# EAGLE board protoCuantumv2old (EAGLE 9.6.2)
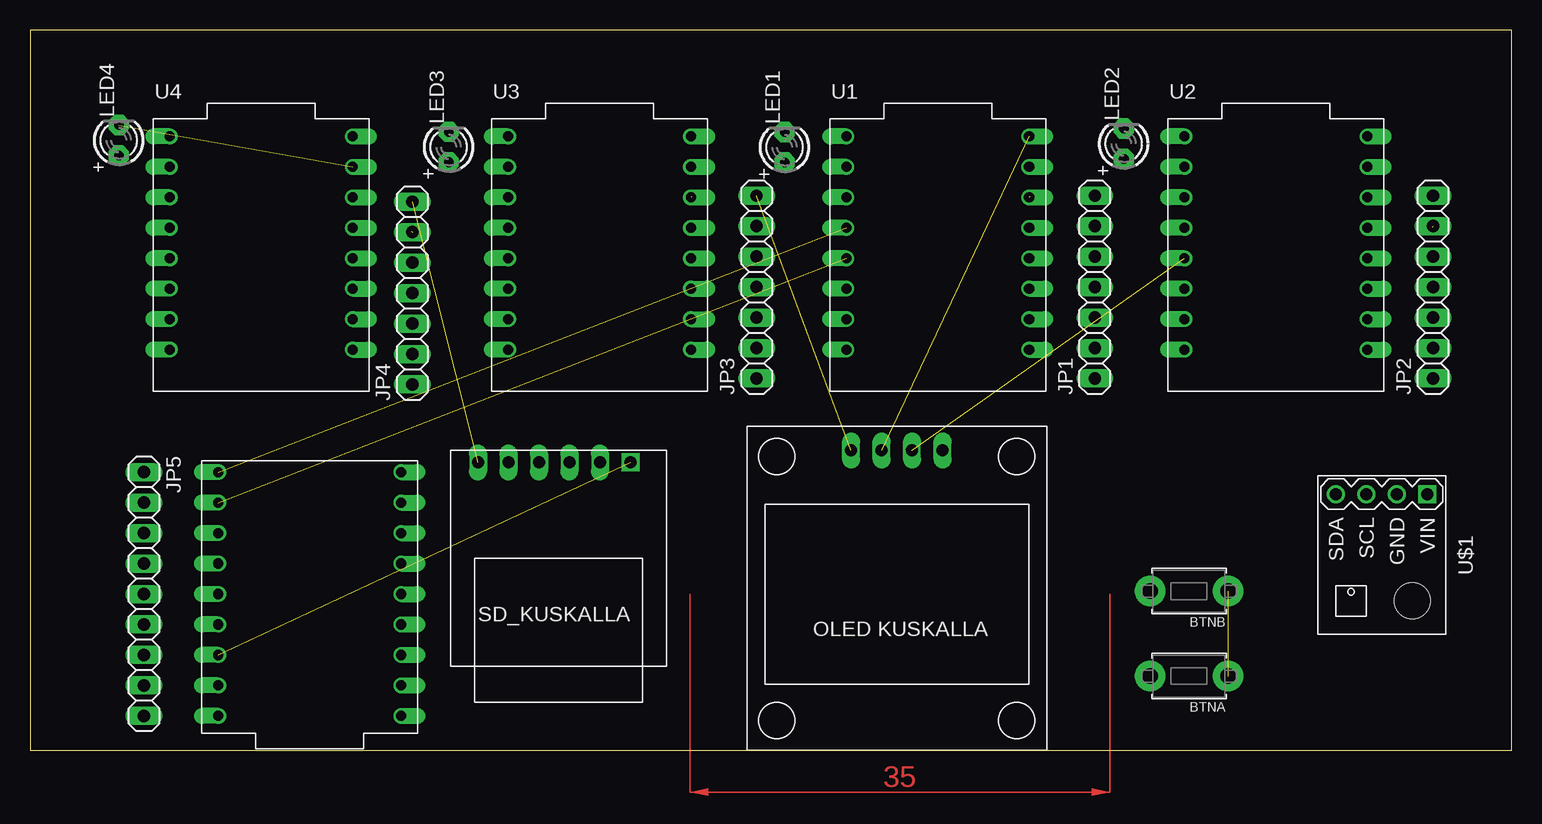
[diagram p0: board, top side]
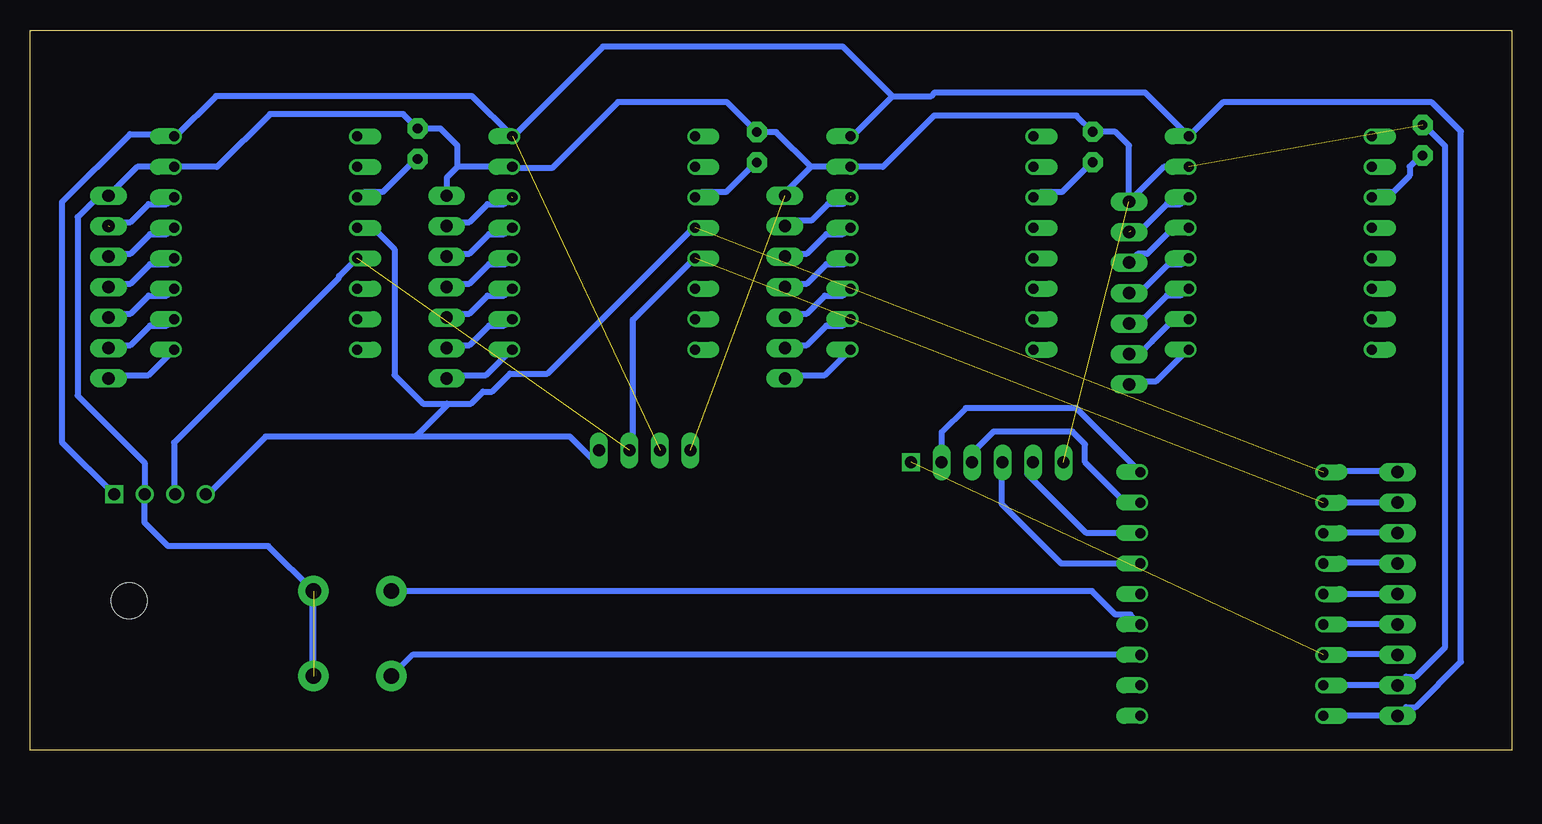
[diagram p1: board, bottom side, seen from below]

Size 123.5 x 60 mm. Coordinates in mm from the lower left corner, seen from the top.
Outline: 0,0 123.5,0 123.5,60 0,60 0,0
Copper layers (1*16): Top 0.035mm / dielectric 1.5mm / Bottom 0.035mm
Design rules "default *": minimum track width 0.5mm, minimum drill 0.8mm, track to track 0.8mm, track to pad 0.8mm, pad to pad 0.8mm, via to via 0.8mm, smd to smd 6mil, copper to edge 40mil, drill to drill 6mil, minimum pad ring 10mil, minimum via ring 8mil, stop-mask expansion 4mil, vias tented up to drill 0mil, thermal gap 10mil

## Footprints (pad centres in the part's own frame; a part is rotated, then mirrored left to right if it is on the bottom)
TACT_PANA-EVQ = drill 1.3 pad 2.54: P$1 -3.25,0; P$2 3.25,0
1X07 = drill 1.016 long: 1 -7.62,0; 2 -5.08,0; 3 -2.54,0; 4 0,0; 5 2.54,0; 6 5.08,0; 7 7.62,0
1X09 = drill 1.016 long: 1 -10.16,0; 2 -7.62,0; 3 -5.08,0; 4 -2.54,0; 5 0,0; 6 2.54,0; 7 5.08,0; 8 7.62,0; 9 10.16,0
LED3MM = drill 0.813 pad 1.676 octagon: A -1.27,0; K 1.27,0
MODULE_ESP32-C3_SUPERMINI_TH = drill 0.84 offset: 0 7.62,-7.88; 1 7.62,-5.34; 2 7.62,-2.8; 3 7.62,-0.26; 3.3 7.62,4.82; 4 7.62,2.28; 5 -7.62,9.9; 5V 7.62,9.9; 6 -7.62,7.36; 7 -7.62,4.82; 8 -7.62,2.28; 9 -7.62,-0.26; 10 -7.62,-2.8; 20 -7.62,-5.34; 21 -7.62,-7.88; G 7.62,7.36
MODULE_ESP32-C3_SUPERMINI_TH' = drill 0.84 offset: 1 -7.62,4.82; 2 -7.62,2.28; 3 -7.62,-0.26; 3.3 7.62,4.82; 4 -7.62,-2.8; 5 -7.62,-5.34; 5V 7.62,9.9; 6 -7.62,-7.88; 7 -7.62,-10.42; 8 7.62,-10.42; 9 7.62,-7.88; 10 7.62,-5.34; 11 7.62,-2.8; 12 7.62,-0.26; 13 7.62,2.28; G 7.62,7.36; RX -7.62,7.36; TX -7.62,9.9
TEMP-HUM-PRES-BME280 = drill 1 square: 1 -5.08,3.81 | drill 1: 2 -5.08,1.27; 3 -5.08,-1.27; 4 -5.08,-3.81 | hole 3: 3.81,2.54
SD_KUSKALLA = drill 1 square: 3V3 -8,6 | drill 1 long: CLK -8,-1.62; CS -8,3.46; GND -8,-6.7; MISO -8,-4.16; MOSI -8,0.92
OLED_KUSKALLA = drill 1 long: GND -3.81,11.5; SCK 1.27,11.5; SDA 3.81,11.5; VDD -1.27,11.5

## Placement (x,y rotation side)
BTNA  [TACT_PANA-EVQ]  96.62,6.16 180 top
BTNB  [TACT_PANA-EVQ]  96.62,13.24 180 top
JP1  [1X07]  88.77,38.58 90 top
JP2  [1X07]  116.96,38.58 90 top
JP3  [1X07]  60.57,38.58 90 top
JP4  [1X07]  31.88,38.08 90 top
JP5  [1X09]  9.5,13 270 top
LED1  [LED3MM]  62.91,50.23 90 top
LED2  [LED3MM]  91.18,50.52 90 top
LED3  [LED3MM]  34.91,50.25 90 top
LED4  [LED3MM]  7.41,50.81 90 top
U1  ESP32-C3_SUPERMINI_TH  [MODULE_ESP32-C3_SUPERMINI_TH]  75.67,41.24 0 top
U2  ESP32-C3_SUPERMINI_TH  [MODULE_ESP32-C3_SUPERMINI_TH]  103.86,41.24 0 top
U3  ESP32-C3_SUPERMINI_TH  [MODULE_ESP32-C3_SUPERMINI_TH]  47.47,41.24 0 top
U4  ESP32-C3_SUPERMINI_TH  [MODULE_ESP32-C3_SUPERMINI_TH]  19.28,41.24 0 top
U5  ESP32-C3_SUPERMINI_TH  [MODULE_ESP32-C3_SUPERMINI_TH']  23.32,12.74 180 top
U$1  TEMP-HUM-PRES-BME280  [TEMP-HUM-PRES-BME280]  112.68,16.24 270 top
U$2  SD_KUSKALLA  [SD_KUSKALLA]  44.05,15.97 270 top
U$3  OLED_KUSKALLA  [OLED_KUSKALLA]  72.26,13.47 0 top

## Library data of the parts
BTNA BTNB LED1-LED4 = adafruit
JP1-JP5 = pinhead
U1-U4 = ESP32-C3_SUPERMINI_TH; AVAILABILITY: Not in stock; CHECK_PRICES: https://www.snapeda.com/parts/ESP32-C3%20SuperMini_TH/Espressif+Systems/view-part/?ref=eda; DESCRIPTION: Super tiny ESP32-C3 board; MF: Espressif Systems; MP: ESP32-C3 SuperMini_TH; PACKAGE: Package; PRICE: None; SNAPEDA_LINK: https://www.snapeda.com/parts/ESP32-C3%20SuperMini_TH/Espressif+Systems/view-part/?ref=snap
U5 = ESP32-S3_SUPERMINI_TH; AVAILABILITY: Not in stock; DESCRIPTION: Super tiny ESP32-S3; MARCA: model S3 esp32; MF: Espressif Systems; MODEL: esp32 S3; MP: ESP32-S3 SuperMini_TH; PACKAGE: Package
U$1 = diy-modules
U$2 = SD_KUSKALLA
U$3 = OLED_KUSKALLA

## Nets
3.3A: JP1.6 U1.3.3
3.3B: JP2.6 U2.3.3
3.3C: JP3.6 U3.3.3
3.3D: JP4.6 U4.3.3
3V3: JP5.7 U5.3.3 U$2.3V3
5V: JP5.9 U1.5V U2.5V U3.5V U4.5V U5.5V U$1.1 U$3.VDD
CLK: U5.4 U$2.CLK
CS: U5.7 U$2.CS
GND: BTNA.P$1 BTNB.P$1 JP1.7 JP2.7 JP3.7 JP4.7 JP5.8 LED1.K LED2.K LED3.K LED4.K U1.G U2.G U3.G U4.G U5.G U$1.2 U$2.GND U$3.GND
GPIO1: BTNA.P$2 U5.1
GPIO2: BTNB.P$2 U5.2
GPIO3: U5.3
GPIO10: JP5.3 U5.10
GPIO11: JP5.4 U5.11
GPIO12: JP5.5 U5.12
GPIO13: JP5.6 U5.13
MISO: U5.5 U$2.MISO
MOSI: U5.6 U$2.MOSI
N$1: LED2.A U2.7
N$2: JP2.1 U2.0
N$3: LED1.A U1.7
N$4: U3.8
N$5: U3.9
N$6: U4.8
N$9: U4.9
N$11: JP4.1 U4.0
N$12: JP4.2 U4.1
N$13: LED3.A U3.7
N$14: LED4.A U4.7
N$15: JP1.1 U1.0
N$16: JP1.2 U1.1
N$17: JP1.3 U1.2
N$18: JP1.4 U1.3
N$19: JP1.5 U1.4
N$20: JP2.2 U2.1
N$21: JP2.3 U2.2
N$22: JP2.4 U2.3
N$23: JP2.5 U2.4
N$24: JP3.1 U3.0
N$25: JP3.2 U3.1
N$26: JP3.3 U3.2
N$27: JP3.4 U3.3
N$28: JP3.5 U3.4
N$29: JP4.3 U4.2
N$30: JP4.4 U4.3
N$31: JP4.5 U4.4
RX: U5.RX
SCK: JP5.2 U1.9 U2.9 U5.9 U$1.3 U$3.SCK
SDA: JP5.1 U1.8 U2.8 U5.8 U$1.4 U$3.SDA
XT: U5.TX

## Tracks (layer width: path | path; a pad name or v marks a point on that pad's centre or on a via)
3.3A  (1 unrouted)
  Bottom 0.5: 83.38,46.12 84,45.5 85.38,45.5 86.88,44 88.12,44 88.25,44.12 88.75,43.62 JP1.6
3.3B  (1 unrouted)
  Bottom 0.5: 116.88,43.62 116.38,44.12 116.25,44 115.12,44 113.62,45.5 112.12,45.5 111.5,46.12 U2.3.3
3.3C  (1 unrouted)
  Bottom 0.5: 55.12,46.12 55.75,45.5 57,45.5 58.38,44.12 60,44.12 60.5,43.62 JP3.6
3.3D  (1 unrouted)
  Bottom 0.5: 31.75,43.25 31.38,43.62 31.25,43.5 30.75,43.5 28.75,45.5 27.62,45.5 27,46.12 U4.3.3
3V3  (1 unrouted)
  Bottom 0.5: U5.3.3 15.62,7.88 15.5,8 9.88,8 9.75,7.88 9.62,8 9.5,8 JP5.7
5V  (1 unrouted)
  Bottom 0.5: 51.62,54.5 48.38,54.5 48.08,54.8 30.56,54.8 U4.5V 24.07,53.97 6.63,53.97 4.22,51.56 4.22,7.33 7.99,3.57 8.77,3.57 JP5.9 U5.5V | 51.62,54.5 55,51.12 U3.5V | 51.62,54.5 55.75,58.62 75.75,58.62 83.12,51.25 U1.5V 86.65,54.5 108,54.5 111.36,51.14 U2.5V 111.67,51.32 115.16,51.32 120.83,45.65 120.83,25.66 U$1.1
CLK
  Bottom 0.5: U5.4 37.54,15.54 42.5,20.5 42.5,23.9 U$2.CLK
CS
  Bottom 0.5: U5.7 36.28,28.5 45.5,28.5 47.51,26.49 U$2.CS
GND  (4 unrouted)
  Bottom 0.5: U5.G JP5.8 8.77,6.11 7.99,6.11 5.52,8.57 5.52,50.32 7.28,52.08 LED4.K | U4.G 28.98,48.6 JP4.7 31.88,50.38 33.02,51.52 LED3.K 36.25,52.86 48.14,52.86 52.4,48.6 U3.G 58.4,48.6 | 87.87,48.6 U1.G 83.19,48.5 80,48.5 74.5,54 65.41,54 LED1.K 61.3,51.5 58.4,48.6 | JP1.7 88.77,47.7 87.87,48.6 | 87.87,48.6 87.87,50.37 89.29,51.79 LED2.K 92.39,53 103.5,53 107.9,48.6 U2.G 114.56,48.6 JP2.7 117.75,46.2 119.53,44.41 119.53,29.53 113.95,23.95 U$1.2 113.95,18.95 112,17 103.63,17 BTNB.P$1 | BTNB.P$1 100,13.11 100,5.5 99.87,5.63 BTNB.P$1 | JP3.7 60.57,46.43 58.4,48.6
GPIO1
  Bottom 0.5: U5.1 91.61,7.92 BTNA.P$2
GPIO2
  Bottom 0.5: U5.2 31.76,11.28 33,11.28 34.97,13.24 BTNB.P$2
GPIO10
  Bottom 0.5: U5.10 15.62,18 15.5,18.12 9.88,18.12 9.75,18 9.62,18.12 9.5,18.12 JP5.3
GPIO11
  Bottom 0.5: U5.11 15.62,15.5 15.5,15.62 9.88,15.62 9.75,15.5 9.62,15.62 9.5,15.62 JP5.4
GPIO12
  Bottom 0.5: U5.12 10.5,13 10.12,12.62 9.62,13.12 JP5.5
GPIO13
  Bottom 0.5: U5.13 15.62,10.38 15.5,10.5 9.88,10.5 9.75,10.38 9.62,10.5 9.5,10.5 JP5.6
MISO
  Bottom 0.5: U5.5 31,18.12 35.5,18.12 40.38,23 40.25,23.12 40.25,23.5 40.38,23.62 40,24 U$2.MISO
MOSI
  Bottom 0.5: U5.6 31.26,20.94 32.5,20.94 35.55,23.98 35.55,25.47 36.6,26.53 43.18,26.53 44.97,24.73 U$2.MOSI
N$1
  Bottom 0.5: LED2.A 91.38,49.25 94.12,46.5 95.62,46.5 96.12,46 U2.7
N$2
  Bottom 0.5: U2.0 111.5,33.38 113.62,31.25 116.25,31.25 116.38,31.38 116.88,30.88 JP2.1
N$3
  Bottom 0.5: U1.7 68,46 67.5,46.5 65.5,46.5 63,49 LED1.A
N$11
  Bottom 0.5: U4.0 27,33.38 29.62,30.75 31.25,30.75 31.38,30.88 31.88,30.38 JP4.1
N$12
  Bottom 0.5: U4.1 28.15,35.9 29.97,34.07 29.97,34.03 31,33 JP4.2
N$13
  Bottom 0.5: U3.7 39.75,46 39.25,46.5 37.5,46.5 35,49 LED3.A
N$14
  Bottom 0.5: U4.7 11.62,46 11.12,46.5 9.88,46.5 8.5,47.88 8.5,48.62 7.5,49.62 LED4.A
N$15
  Bottom 0.5: U1.0 83.38,33.38 85.5,31.25 88.12,31.25 88.25,31.38 88.75,30.88 JP1.1
N$16
  Bottom 0.5: JP1.2 88.62,33.5 88.25,33.88 88.12,33.75 86.88,33.75 85.25,35.38 84,35.38 83.38,36 U1.1
N$17
  Bottom 0.5: U1.2 83.38,38.5 84,37.88 85.38,37.88 86.88,36.38 88.12,36.38 88.25,36.5 88.75,36 JP1.3
N$18
  Bottom 0.5: U1.3 83.38,41 83.88,40.5 85.25,40.5 86.88,38.88 88.12,38.88 88.25,39 88.75,38.5 JP1.4
N$19
  Bottom 0.5: U1.4 83.38,43.62 84,43 85.25,43 86.88,41.38 88.12,41.38 88.25,41.5 88.75,41 JP1.5
N$20
  Bottom 0.5: JP2.2 116.75,33.5 116.38,33.88 116.25,33.75 115.12,33.75 113.5,35.38 112.12,35.38 111.5,36 U2.1
N$21
  Bottom 0.5: U2.2 111.5,38.5 112.12,37.88 113.62,37.88 115.12,36.38 116.25,36.38 116.38,36.5 116.88,36 JP2.3
N$22
  Bottom 0.5: U2.3 111.5,41 112,40.5 113.5,40.5 115.12,38.88 116.25,38.88 116.38,39 116.88,38.5 JP2.4
N$23
  Bottom 0.5: U2.4 111.5,43.62 112.12,43 113.5,43 115.12,41.38 116.25,41.38 116.38,41.5 116.88,41 JP2.5
N$24
  Bottom 0.5: U3.0 55.12,33.38 57.25,31.25 59.88,31.25 60,31.38 60.5,30.88 JP3.1
N$25
  Bottom 0.5: JP3.2 60.38,33.5 60,33.88 59.88,33.75 58.75,33.75 57.12,35.38 55.75,35.38 55.12,36 U3.1
N$26
  Bottom 0.5: U3.2 55.12,38.5 55.75,37.88 57.25,37.88 58.75,36.38 59.88,36.38 60,36.5 60.5,36 JP3.3
N$27
  Bottom 0.5: U3.3 55.12,41 55.62,40.5 57.12,40.5 58.75,38.88 59.88,38.88 60,39 60.5,38.5 JP3.4
N$28
  Bottom 0.5: U3.4 55.12,43.62 55.75,43 57.12,43 58.75,41.38 59.88,41.38 60,41.5 60.5,41 JP3.5
N$29
  Bottom 0.5: JP4.3 31.88,35.5 31.38,36 30.62,36 28.75,37.88 27.62,37.88 27,38.5 U4.2
N$30
  Bottom 0.5: U4.3 27,41 27.5,40.5 28.62,40.5 30.75,38.38 31.25,38.38 31.38,38.5 31.88,38 JP4.4
N$31
  Bottom 0.5: JP4.5 31.15,41.35 30.36,41.35 28.19,43.52 U4.4
SCK  (2 unrouted)
  Bottom 0.5: U1.9 68.12,41 73.25,35.88 73.25,25.38 73.12,25.25 73.5,24.88 U$3.SCK | U$1.3 111.5,21.38 111.5,25.62 97.75,39.38 97.75,39.5 96.25,41 U2.9 | U5.9 15.62,20.5 15.5,20.62 9.88,20.62 9.75,20.5 9.62,20.62 JP5.2
SDA  (1 unrouted)
  Bottom 0.5: 91.25,26.12 78.5,26.12 76.75,24.38 76.12,25 U$3.SDA | 91.25,26.12 103.88,26.12 108.75,21.25 U$1.4 | 88.75,28.88 90.75,28.88 93.12,31.25 93.12,41.75 94.88,43.5 95.88,43.5 96,43.62 96.12,43.5 U2.8 | 88.75,28.88 86.75,28.88 85.75,29.88 85,29.88 83.5,31.38 80.38,31.38 68.12,43.62 U1.8 | 91.25,26.12 91.25,26.25 88.75,28.75 88.75,28.88 | U5.8 15.62,23.12 15.5,23.25 9.88,23.25 9.75,23.12 9.62,23.25 9.5,23.25 JP5.1
(copper drawn outside any net)
  shapes: Top area x1